# Altium PCB US_Sensor-board.PcbDoc
Units mm, origin at the board's own origin, x right, y up, seen from the top; angles counter-clockwise.
Board outline 20 x 23 mm, 2 copper layers (Top Layer, Bottom Layer); 9 components, 11 nets, 39 pads, 29 vias.
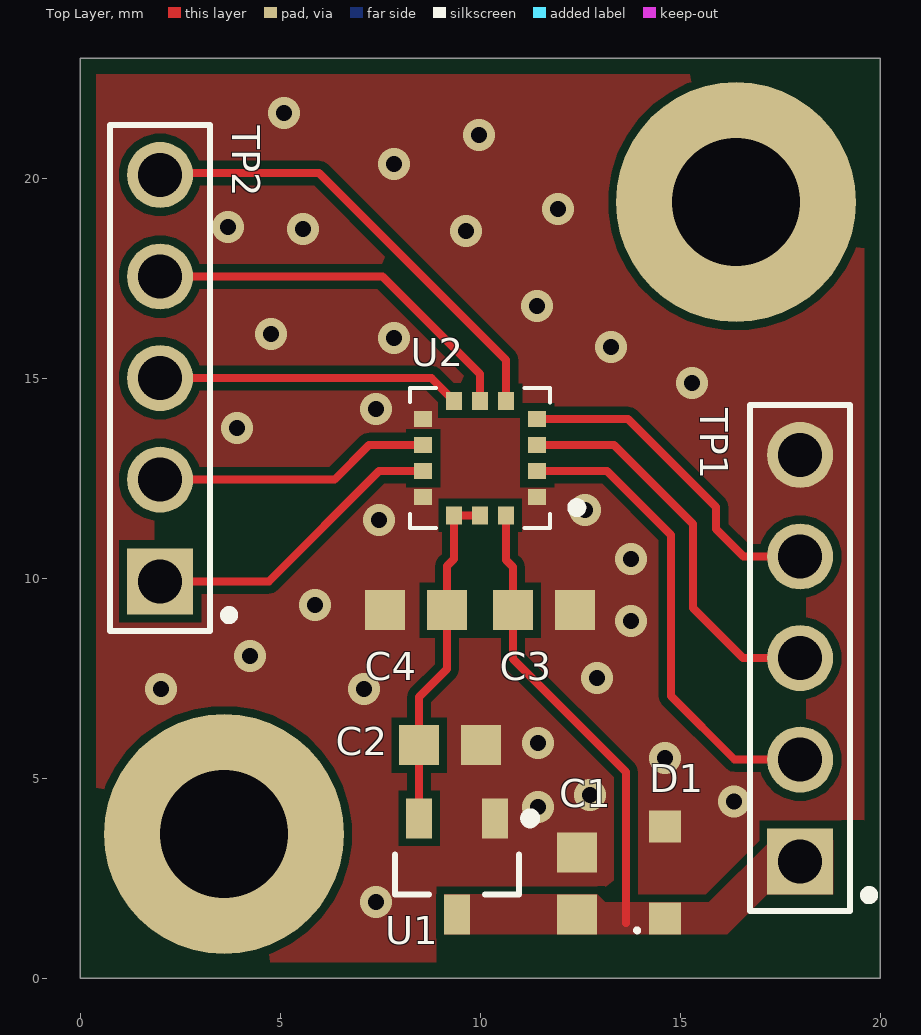
[diagram p0: Top Layer view]
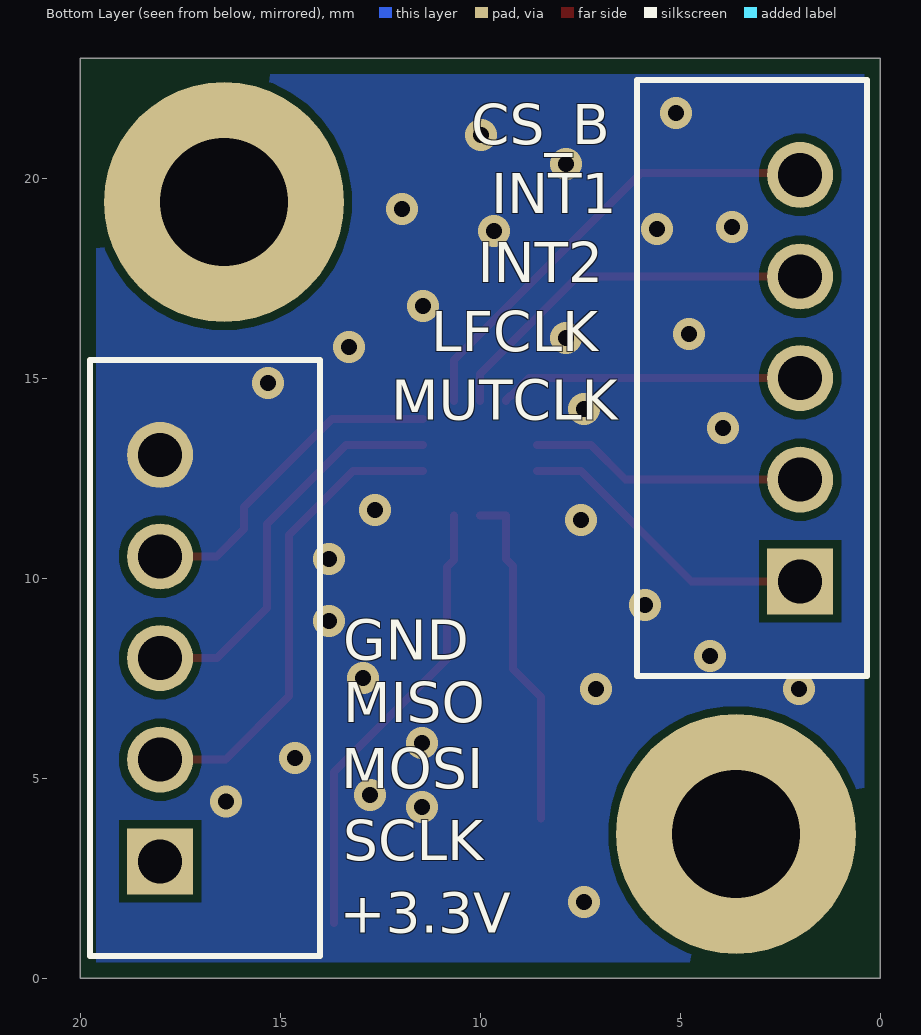
[diagram p1: Bottom Layer view, seen from below]

## Layer stack, top to bottom
Top Solder: solder mask 0.0102, Solder Resist, Dk 3.5
Top Layer: signal copper 0.0356
Dielectric 1: dielectric 0.32, FR-4, Dk 4.8
Bottom Layer: signal copper 0.0356
Bottom Solder: solder mask 0.0102, Solder Resist, Dk 3.5

## Board outline
0,0 20,0 20,23 0,23

## Design rules (kind name [scope] priority, off if disabled: settings)
Clearance [All] p1: gap=0.2 ignorepadtopadclearanceinfootprint=FALSE except(0.15: Arc-SMDPad Arc-Text Track-SMDPad Track-Text SMDPad-SMDPad SMDPad-Text SMDPad-Hole THPad-Text Via-Text Fill-Text Poly-Text Region-Text; 0.16: Arc-Arc Arc-Track Track-Track)
HoleSize [All] p1: absolutevalues=TRUE maxlimit=6.3 minlimit=0.15 maxpercent=80.000 minpercent=20.000
MinimumSolderMaskSliver [All] p1: minsoldermaskwidth=0.15
PasteMaskExpansion [All] p1: expansion=0 thpadusetoppaste=TRUE thpadusebottompaste=TRUE
PlaneConnect [All] p1: planeconnectstyle=Direct reliefexpansion=0.508 reliefentries=4 reliefconductorwidth=0.254 reliefairgap=0.254
PolygonConnect [All] p1: connectstyle=Direct reliefconductorwidth=0.254 reliefentries=4 polygonreliefangle="90 Angle" airgapwidth=0.254
RoutingVias [All] p1: holewidth=0.4 width=0.8 viastyle="Through Hole" minholewidth=0.2 minwidth=0.4 maxholewidth=10 maxwidth=10
SMDEntry [All] p1: side=FALSE corner=FALSE anyangle=TRUE
SilkToSolderMaskClearance [IsPad] p1 off: minsilkscreentomaskgap=0.15 clearancetoexposedcopper=TRUE
SolderMaskExpansion [All] p1: expansion=0.038 istentingtop=FALSE
SupplyNets "Schematic Supply Nets_2" [InNet('+3.3')] p1: voltage=0.000
SupplyNets "Schematic Supply Nets" [InNet('GND')] p2: voltage=0.000
UnRoutedNet [All] p1: checkbadconnections=TRUE
Width [All] p1: maxlimit=0.5 minlimit=0.2 preferedwidth=0.2 minimp=50.000000 maximp=50.000000 favimp=50.000000
24 further rules are at their usual default settings.

## Components (designator, comment, footprint, x,y, rotation, side; value= is the part's Value field where it differs from the comment)
C1 "1uF" LT_Capacitor_1uF-Footprint-1 12.425,2.37 r270 top value=1µF
C2 "1uF" LT_Capacitor_1uF-Footprint-1 9.25,5.825 r180 top value=1µF
C3 "1uF" LT_Capacitor_1uF-Footprint-1 11.6,9.2 r180 top value=1µF
C4 "100nF" CAPC1608X08N 8.4,9.2 r0 top
D1 "MM3Z9V1B - RVP" "SOD323-F - RVP" 14.625,2.645 r90 top
TP1 "LT testpoint Pin Header contact" "New footprint 1" 18,8 r90 top
TP2 "LT testpoint Pin Header contact" "New footprint 1" 2,15 r90 top
U1 "MCP1700T-1802E/TT" MCP1700T-1802E/TT 9.425,2.795 r270 top
U2 "LT_ICU-10201-00" LT_ICU-10201-00-Footprint-1 10,13 r180 top

## Footprints (in the part's own frame and the unit in brackets; to place one, negate y for a bottom-side part, rotate by r counter-clockwise, add the part's x,y. Pads: shape width x height; smd on the part's side, far side on the other; paste and mask are expansions set on the pad)
CAPC1608X08N [mm] "Chip Capacitor, 2-Leads, Body 1.60x0.80mm, IPC Medium Density"
  rect 1x1 smd: 1(-0.775,0) 2(0.775,0)
  body extent -0.87,-0.48 0.87,0.47, height 0.8
LT_Capacitor_1uF-Footprint-1 [mm] "Chip Capacitor, 2-Leads, Body 1.60x0.80mm, IPC Medium Density"
  rect 1x1 smd: 1(-0.775,0) 2(0.775,0)
  body extent -0.87,-0.48 0.87,0.47, height 0.8
LT_ICU-10201-00-Footprint-1 [mm]
  rect 0.45x0.4 smd: 1(-1.425,0.975) 2(-1.425,0.325) 3(-1.425,-0.325) 4(-1.425,-0.975) 8(1.425,-0.975) 9(1.425,-0.325) 10(1.425,0.325) 11(1.425,0.975)
  rect 0.4x0.45 smd: 5(-0.65,-1.43) 6(0,-1.43) 7(0.65,-1.43) 12(0.65,1.43) 13(0,1.43) 14(-0.65,1.43)
  silkscreen extent -2.53,-1.75 1.75,1.75, body extent -1.75,-1.75 1.75,1.75, height 1.36
MCP1700T-1802E/TT [mm] "SOT23, 3-Leads, Body 2.86x2.37mm, Pitch 0.95mm, IPC Medium Density"
  rect 1x0.65 smd: 1(-1.2,0.95) 2(-1.2,-0.95) 3(1.2,0)
  silkscreen extent -1.32,-1.55 0.7,1.95, body extent -0.7,-1.52 0.7,1.53, height 1.12
"New footprint 1" [mm]
  rect 1.65x1.65 hole 1.1: 1(-5.08,0)
  round 1.65 hole 1.1: 2(-2.54,0) 3(0,0) 4(2.54,0) 5(5.08,0)
  silkscreen extent -6.32,-1.83 6.33,1.25
"SOD323-F - RVP" [mm] "SODFL, 2-Leads, Body 1.30x2.50mm, IPC Medium Density"
  rect 0.8x0.8 smd: 1(-1.15,0) 2(1.15,0)
  silkscreen extent -1.5,0.65 -1.4,0.75, body extent -0.9,-0.72 0.9,0.72, height 1

## Part data
C1 C2 C3: library part CMP-001-00094-6, "SMD Multilayer Ceramic Capacitor, 1 µF, 6.3 V, 0603 [1608 Metric], ± 10%, X7R", Capacitor Type=SMD, Case/Package=0603, ComponentLink1Description=Farnell, ComponentLink1URL=https://ee.farnell.com/kemet/c0603c105k9rac7411/cap-1uf-6-3v-mlcc-0603/dp/3508545, Pins=2
C4: library part CMP-001-00095-3, "SMD Multilayer Ceramic Capacitor, 0.1 µF, 25 V, 0603 [1608 Metric], ± 10%, X7R", Capacitor Type=SMD, Case/Package=0603, ComponentLink1Description=Farnell, ComponentLink1URL=https://ee.farnell.com/kemet/c0603c104k3ractu/cap-0-1-f-25v-10-x7r-0603/dp/1650835, Pins=2
D1: library part CMP-004-00031-3, "Zener Single Diode, 9.1 V, 200 mW, SOD-323F, 2 Pins, 150 °C, Surface Mount", Case/Package=SOD-323F, Forward Current=5mA, Forward Voltage=9.1V, Max Operating Temperature=150°C, Min Operating Temperature=-65°C, Peak Inverse Voltage=6V, ComponentLink1Description=Farnell, ComponentLink1URL=https://ee.farnell.com/on-semiconductor/mm3z9v1b/zener-diode-0-2w-9-1v-sod-323f/dp/2454001, ComponentLink2Description=Datasheet, ComponentLink2URL=http://www.farnell.com/datasheets/1706525.pdf, Mounting Technology=SMD, Pins=2
TP1 TP2: library part CMP-002-00080-1, "5 pin testpoint contact", Gender=F, Pins=5
U1: library part CMP-019-00050-5, "Fixed LDO Voltage Regulator, 2.3V to 6V, 178mV Dropout, 1.8Vout, 200mAout, SOT-23-3", Case/Package=SOT-23, Dropout Voltage=178mV, Max Operating Temperature=125°C, Max Supply Voltage=6V, Min Operating Temperature=-40°C, Min Supply Voltage=1.8V, Output Current=250mA, ComponentLink1Description=Farnell, ComponentLink1URL=https://ee.farnell.com/microchip/mcp1700t-1802e-tt/ic-v-reg-ldo-250ma-smd-sot-23/dp/1296591, Output Voltage=1.8V, Pins=3
U2: library part CMP-031-00007-3, "High-performance, miniature, ultra-low power, long-range ultrasonic transceiver.", Case/Package=LGA, Max Operating Temperature=85°C, Min Operating Temperature=-40°C, ComponentLink1Description=Farnell, ComponentLink1URL=https://ee.farnell.com/tdk/icu-10201-00/ultrasonic-sensor-tof-1-2m-lga/dp/4712307, Pins=14

## Free pads (board coordinates)
  round 6 hole 3.2: 2(16.4,19.4) 3(3.6,3.6)

## Via types
v1: diameter 0.8, hole 0.4, Top Layer to Bottom Layer, tented both sides, 29 vias

## Nets (pads, with @x,y where several pads share a name; then routed paths per layer and width w, separated by ;. In a path a pad name is that pad's centre, name@x,y a point inside that pad or via, vN(x,y) a via of type N, cw(c..) or ccw(c..) an arc to the next point about the centre after c; other vN are vias at no path point)
1.8V: C2.2 C4.2 U1.2 U2.12 U2.13 | length 8.6
  Top Layer w0.2: U1.2 C2.2 8.475,7.025 9.175,7.725 C4.2 9.175,10.3 9.35,10.475 U2.12 U2.13
+3.3: C1.2 C3.2 D1.1 TP1.1 U1.3 U2.14 | length 11.4
  Top Layer w0.2: U2.14 10.65,10.45 10.825,10.275 10.825,7.975 13.65,5.15 13.65,1.375
CS_B: TP2.5 U2.5 | length 11.6
  Top Layer w0.2: TP2.5 2.045,20.125 5.975,20.125 10.65,15.45 U2.5
GND: C1.1 C2.1 C3.1 C4.1 D1.2 TP1.5 U1.1 U2.1 U2.8 U2.11
  other v1: 7.4,1.9 11.45,4.275 16.353,4.42 12.75,4.575 14.625,5.5 11.45,5.875 2.025,7.225 7.1,7.225 12.925,7.5 4.25,8.05 13.775,8.925 5.875,9.325 13.775,10.475 7.475,11.45 12.625,11.7 3.925,13.75 7.4,14.225 15.3,14.875 13.275,15.775 7.85,16 4.775,16.1 11.425,16.8 9.65,18.675 5.575,18.725 3.7,18.775 11.95,19.225 7.85,20.35 9.975,21.075 5.1,21.625
INT1: TP2.4 U2.6 | length 9.7
  Top Layer w0.2: TP2.4 7.56,17.54 10,15.1 U2.6
INT2: TP2.3 U2.7 | length 7.6
  Top Layer w0.2: TP2.3 8.78,15 9.225,14.555 9.25,14.555 9.35,14.455 U2.7
LFCLK: TP2.2 U2.9 | length 6.9
  Top Layer w0.2: TP2.2 6.36,12.46 7.225,13.325 U2.9
MISO: TP1.4 U2.4 | length 8.3
  Top Layer w0.2: U2.4 13.7,13.975 15.9,11.775 15.9,11.225 16.585,10.54 TP1.4
MOSI: TP1.3 U2.3 | length 10
  Top Layer w0.2: U2.3 13.35,13.325 15.325,11.35 15.325,9.25 16.575,8 TP1.3
MUTCLK: TP2.1 U2.10 | length 7.7
  Top Layer w0.2: TP2.1 4.72,9.92 7.475,12.675 U2.10
SCLK: TP1.2 U2.2 | length 11.9
  Top Layer w0.2: U2.2 13.175,12.675 14.775,11.075 14.775,7.05 16.365,5.46 TP1.2

## Polygon pours and split planes (outlines as drawn)
GND on Top Layer "Top GND" (solid, remove dead copper, pour order 2): 0.4,0.4 19.6,0.4 19.6,22.6 0.4,22.6
+3.3 on Top Layer "3.3V" (solid, remove dead copper, pour order 18): 9.1,2.095 9.1,1.095 16.175,1.095 17.175,2.095 18.825,2.095 18.825,3.45 17.275,3.45 15.72,1.895 13.125,1.895 12.925,2.095
GND on Bottom Layer "Bottom GND" (solid, remove dead copper, pour order 6): 0.4,0.4 19.6,0.4 19.6,22.6 0.4,22.6

## Other copper
Top Layer:
  pour cut-out: 18.135,9.515 17.865,9.515 17.865,9.025 18.135,9.025
  pour cut-out: 9.875,8.5 10.125,8.5 10.125,9.9 9.875,9.9
  pour cut-out: 1.865,11.435 1.865,10.944 2.135,10.944 2.135,11.435
  pour cut-out: 8.9,0.895 8.9,0.35 9.225,0.35 9.225,0.766 9.1,0.891
  pour cut-out: 19.025,3.945 19.03,3.95 19.6,3.95 19.6,3.7 19.025,3.7
  pour cut-out: 17.865,6.975 17.865,6.485 18.135,6.485 18.135,6.975

## Silkscreen, mask and mechanical layers (free items; w line width, h text height)
Bottom Overlay:
  lines w0.15: 0.325,7.55 6.075,7.55 6.075,22.45 0.325,22.45 0.325,7.55 ; 14,0.55 19.75,0.55 19.75,15.45 14,15.45 14,0.55
  text "CS_B" at 10.222,20.846 h1
  text "INT1" at 9.722,19.123 h1
  text "INT2" at 10.055,17.4 h1
  text "LFCLK" at 11.221,15.677 h1
  text "MUTCLK" at 12.221,13.954 h1
  text "GND" at 13.421,7.954 h1
  text "MISO" at 13.421,6.398 h1
  text "MOSI" at 13.472,4.746 h1
  text "SCLK" at 13.421,2.952 h1
  text "+3.3V" at 13.511,1.137 h1
Top Courtyard:
  circle w0.15: c10,13 r5.8